# EAGLE board ww4 (EAGLE 7.2.0), part 1 of 2
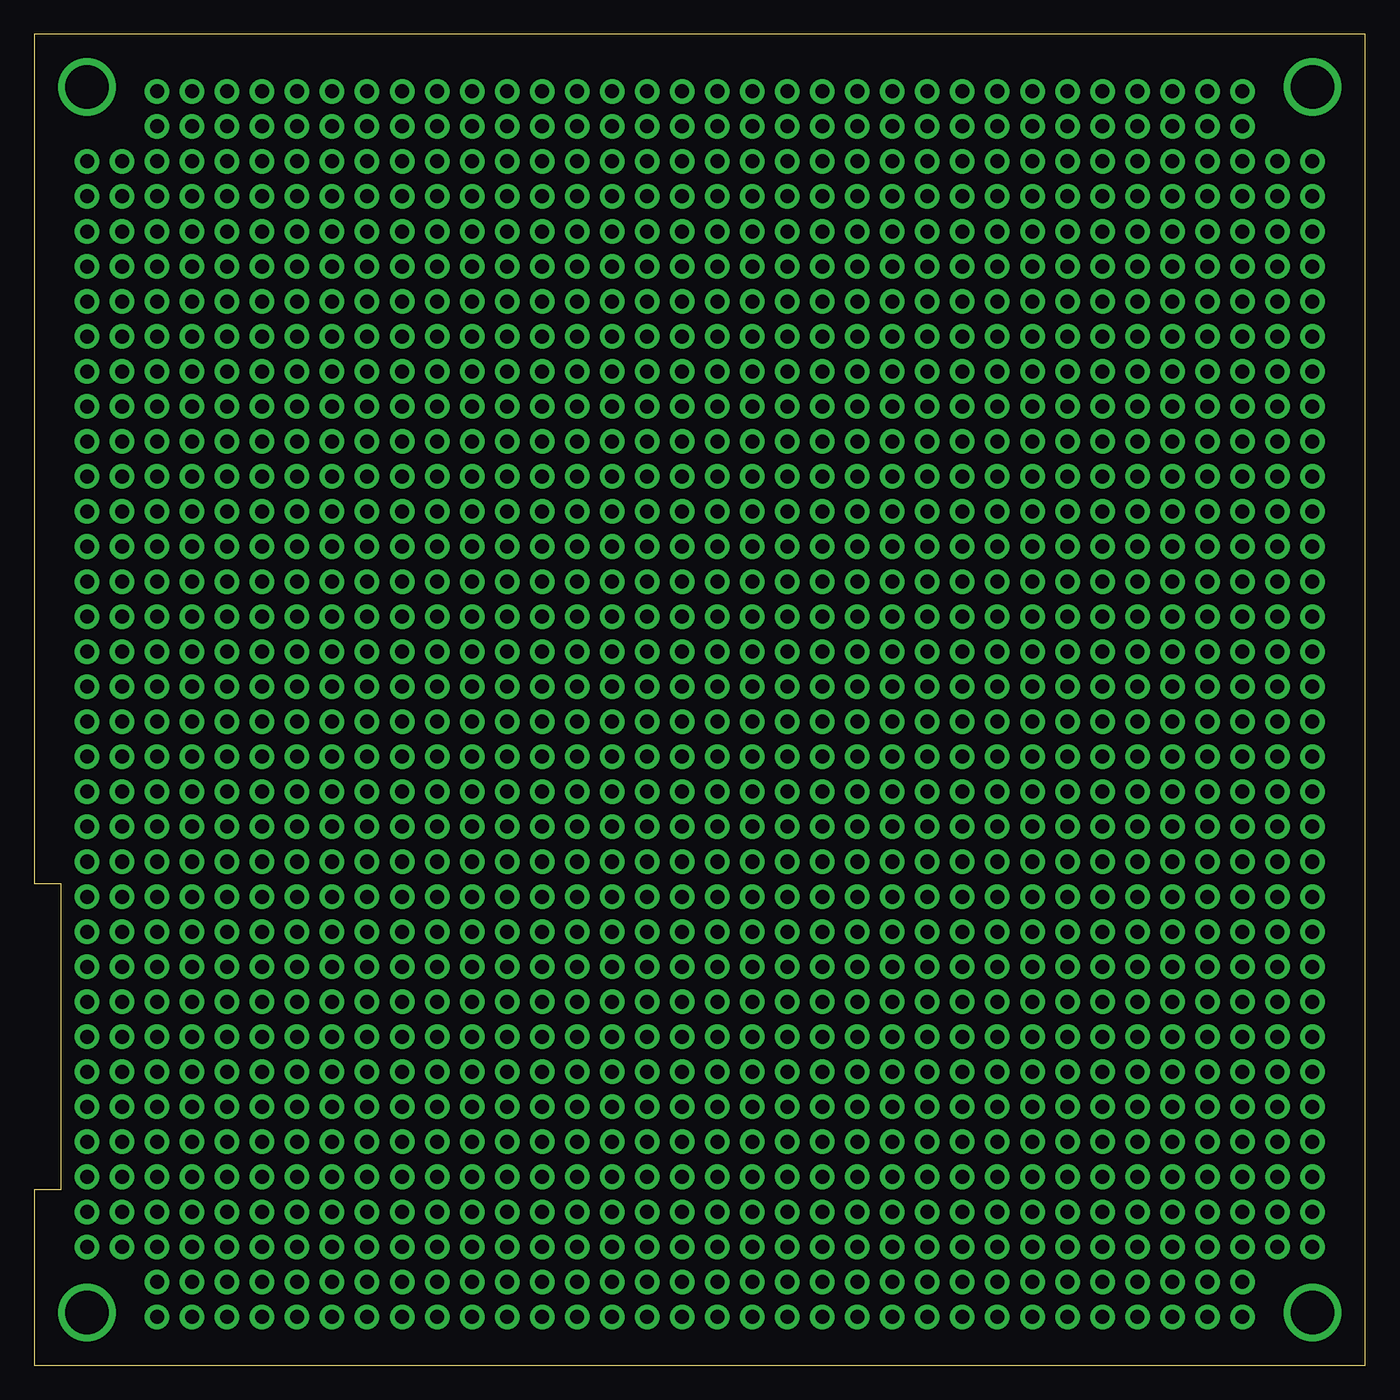
[diagram p0: board, top side]

Size 96.52 x 96.52 mm. Coordinates in mm from the lower left corner, seen from the top.
Outline: 0,0 96.52,0 96.52,96.52 0,96.52 0,34.92 1.91,34.92 1.91,12.7 0,12.7 0,0
Copper layers (1*16): Top 0.035mm / dielectric 1.5mm / Bottom 0.035mm
Design rules "default": minimum track width 10mil, minimum drill 24mil, track to track 8mil, track to pad 8mil, pad to pad 8mil, via to via 8mil, smd to smd 8mil, copper to edge 20mil, drill to drill 8mil, minimum pad ring 10mil, minimum via ring 8mil, stop-mask expansion 4mil, vias tented up to drill 0mil, thermal gap 10mil

## Placement (x,y rotation side)

## Tracks (layer width: path | path; a pad name or v marks a point on that pad's centre or on a via)
MOUNT0  (via drill 3.17 pad 3.17)
  other vias: 3.81,3.81
MOUNT1  (via drill 3.17 pad 3.17)
  other vias: 3.81,92.71
MOUNT2  (via drill 3.17 pad 3.17)
  other vias: 92.71,92.71
MOUNT3  (via drill 3.17 pad 3.17)
  other vias: 3.81,92.71
MOUNT6  (via drill 3.17 pad 3.17)
  other vias: 92.71,3.81
MOUNT7  (via drill 3.17 pad 3.17)
  other vias: 92.71,92.71
WW2  (via drill 1.02 pad 1.78)
  other vias: 3.81,8.57
WW3  (via drill 1.02 pad 1.78)
  other vias: 3.81,11.11
WW4  (via drill 1.02 pad 1.78)
  other vias: 3.81,13.65
WW5  (via drill 1.02 pad 1.78)
  other vias: 3.81,16.19
WW6  (via drill 1.02 pad 1.78)
  other vias: 3.81,18.73
WW7  (via drill 1.02 pad 1.78)
  other vias: 3.81,21.27
WW8  (via drill 1.02 pad 1.78)
  other vias: 3.81,23.81
WW9  (via drill 1.02 pad 1.78)
  other vias: 3.81,26.35
WW10  (via drill 1.02 pad 1.78)
  other vias: 3.81,28.89
WW11  (via drill 1.02 pad 1.78)
  other vias: 3.81,31.43
WW12  (via drill 1.02 pad 1.78)
  other vias: 3.81,33.97
WW13  (via drill 1.02 pad 1.78)
  other vias: 3.81,36.51
WW14  (via drill 1.02 pad 1.78)
  other vias: 3.81,39.05
WW15  (via drill 1.02 pad 1.78)
  other vias: 3.81,41.59
WW16  (via drill 1.02 pad 1.78)
  other vias: 3.81,44.13
WW17  (via drill 1.02 pad 1.78)
  other vias: 3.81,46.67
WW18  (via drill 1.02 pad 1.78)
  other vias: 3.81,49.21
WW19  (via drill 1.02 pad 1.78)
  other vias: 3.81,51.75
WW20  (via drill 1.02 pad 1.78)
  other vias: 3.81,54.29
WW21  (via drill 1.02 pad 1.78)
  other vias: 3.81,56.83
WW22  (via drill 1.02 pad 1.78)
  other vias: 3.81,59.37
WW23  (via drill 1.02 pad 1.78)
  other vias: 3.81,61.91
WW24  (via drill 1.02 pad 1.78)
  other vias: 3.81,64.45
WW25  (via drill 1.02 pad 1.78)
  other vias: 3.81,66.99
WW26  (via drill 1.02 pad 1.78)
  other vias: 3.81,69.53
WW27  (via drill 1.02 pad 1.78)
  other vias: 3.81,72.07
WW28  (via drill 1.02 pad 1.78)
  other vias: 3.81,74.61
WW29  (via drill 1.02 pad 1.78)
  other vias: 3.81,77.15
WW30  (via drill 1.02 pad 1.78)
  other vias: 3.81,79.69
WW31  (via drill 1.02 pad 1.78)
  other vias: 3.81,82.23
WW32  (via drill 1.02 pad 1.78)
  other vias: 3.81,84.77
WW33  (via drill 1.02 pad 1.78)
  other vias: 3.81,87.31
WW39  (via drill 1.02 pad 1.78)
  other vias: 6.35,8.57
WW40  (via drill 1.02 pad 1.78)
  other vias: 6.35,11.11
WW41  (via drill 1.02 pad 1.78)
  other vias: 6.35,13.65
WW42  (via drill 1.02 pad 1.78)
  other vias: 6.35,16.19
WW43  (via drill 1.02 pad 1.78)
  other vias: 6.35,18.73
WW44  (via drill 1.02 pad 1.78)
  other vias: 6.35,21.27
WW45  (via drill 1.02 pad 1.78)
  other vias: 6.35,23.81
WW46  (via drill 1.02 pad 1.78)
  other vias: 6.35,26.35
WW47  (via drill 1.02 pad 1.78)
  other vias: 6.35,28.89
WW48  (via drill 1.02 pad 1.78)
  other vias: 6.35,31.43
WW49  (via drill 1.02 pad 1.78)
  other vias: 6.35,33.97
WW50  (via drill 1.02 pad 1.78)
  other vias: 6.35,36.51
WW51  (via drill 1.02 pad 1.78)
  other vias: 6.35,39.05
WW52  (via drill 1.02 pad 1.78)
  other vias: 6.35,41.59
WW53  (via drill 1.02 pad 1.78)
  other vias: 6.35,44.13
WW54  (via drill 1.02 pad 1.78)
  other vias: 6.35,46.67
WW55  (via drill 1.02 pad 1.78)
  other vias: 6.35,49.21
WW56  (via drill 1.02 pad 1.78)
  other vias: 6.35,51.75
WW57  (via drill 1.02 pad 1.78)
  other vias: 6.35,54.29
WW58  (via drill 1.02 pad 1.78)
  other vias: 6.35,56.83
WW59  (via drill 1.02 pad 1.78)
  other vias: 6.35,59.37
WW60  (via drill 1.02 pad 1.78)
  other vias: 6.35,61.91
WW61  (via drill 1.02 pad 1.78)
  other vias: 6.35,64.45
WW62  (via drill 1.02 pad 1.78)
  other vias: 6.35,66.99
WW63  (via drill 1.02 pad 1.78)
  other vias: 6.35,69.53
WW64  (via drill 1.02 pad 1.78)
  other vias: 6.35,72.07
WW65  (via drill 1.02 pad 1.78)
  other vias: 6.35,74.61
WW66  (via drill 1.02 pad 1.78)
  other vias: 6.35,77.15
WW67  (via drill 1.02 pad 1.78)
  other vias: 6.35,79.69
WW68  (via drill 1.02 pad 1.78)
  other vias: 6.35,82.23
WW69  (via drill 1.02 pad 1.78)
  other vias: 6.35,84.77
WW70  (via drill 1.02 pad 1.78)
  other vias: 6.35,87.31
WW74  (via drill 1.02 pad 1.78)
  other vias: 8.89,3.49
WW75  (via drill 1.02 pad 1.78)
  other vias: 8.89,6.03
WW76  (via drill 1.02 pad 1.78)
  other vias: 8.89,8.57
WW77  (via drill 1.02 pad 1.78)
  other vias: 8.89,11.11
WW78  (via drill 1.02 pad 1.78)
  other vias: 8.89,13.65
WW79  (via drill 1.02 pad 1.78)
  other vias: 8.89,16.19
WW80  (via drill 1.02 pad 1.78)
  other vias: 8.89,18.73
WW81  (via drill 1.02 pad 1.78)
  other vias: 8.89,21.27
WW82  (via drill 1.02 pad 1.78)
  other vias: 8.89,23.81
WW83  (via drill 1.02 pad 1.78)
  other vias: 8.89,26.35
WW84  (via drill 1.02 pad 1.78)
  other vias: 8.89,28.89
WW85  (via drill 1.02 pad 1.78)
  other vias: 8.89,31.43
WW86  (via drill 1.02 pad 1.78)
  other vias: 8.89,33.97
WW87  (via drill 1.02 pad 1.78)
  other vias: 8.89,36.51
WW88  (via drill 1.02 pad 1.78)
  other vias: 8.89,39.05
WW89  (via drill 1.02 pad 1.78)
  other vias: 8.89,41.59
WW90  (via drill 1.02 pad 1.78)
  other vias: 8.89,44.13
WW91  (via drill 1.02 pad 1.78)
  other vias: 8.89,46.67
WW92  (via drill 1.02 pad 1.78)
  other vias: 8.89,49.21
WW93  (via drill 1.02 pad 1.78)
  other vias: 8.89,51.75
WW94  (via drill 1.02 pad 1.78)
  other vias: 8.89,54.29
WW95  (via drill 1.02 pad 1.78)
  other vias: 8.89,56.83
WW96  (via drill 1.02 pad 1.78)
  other vias: 8.89,59.37
WW97  (via drill 1.02 pad 1.78)
  other vias: 8.89,61.91
WW98  (via drill 1.02 pad 1.78)
  other vias: 8.89,64.45
WW99  (via drill 1.02 pad 1.78)
  other vias: 8.89,66.99
WW100  (via drill 1.02 pad 1.78)
  other vias: 8.89,69.53
WW101  (via drill 1.02 pad 1.78)
  other vias: 8.89,72.07
WW102  (via drill 1.02 pad 1.78)
  other vias: 8.89,74.61
WW103  (via drill 1.02 pad 1.78)
  other vias: 8.89,77.15
WW104  (via drill 1.02 pad 1.78)
  other vias: 8.89,79.69
WW105  (via drill 1.02 pad 1.78)
  other vias: 8.89,82.23
WW106  (via drill 1.02 pad 1.78)
  other vias: 8.89,84.77
WW107  (via drill 1.02 pad 1.78)
  other vias: 8.89,87.31
WW108  (via drill 1.02 pad 1.78)
  other vias: 8.89,89.85
WW109  (via drill 1.02 pad 1.78)
  other vias: 8.89,92.39
WW111  (via drill 1.02 pad 1.78)
  other vias: 11.43,3.49
WW112  (via drill 1.02 pad 1.78)
  other vias: 11.43,6.03
WW113  (via drill 1.02 pad 1.78)
  other vias: 11.43,8.57
WW114  (via drill 1.02 pad 1.78)
  other vias: 11.43,11.11
WW115  (via drill 1.02 pad 1.78)
  other vias: 11.43,13.65
WW116  (via drill 1.02 pad 1.78)
  other vias: 11.43,16.19
WW117  (via drill 1.02 pad 1.78)
  other vias: 11.43,18.73
WW118  (via drill 1.02 pad 1.78)
  other vias: 11.43,21.27
WW119  (via drill 1.02 pad 1.78)
  other vias: 11.43,23.81
WW120  (via drill 1.02 pad 1.78)
  other vias: 11.43,26.35
WW121  (via drill 1.02 pad 1.78)
  other vias: 11.43,28.89
WW122  (via drill 1.02 pad 1.78)
  other vias: 11.43,31.43
WW123  (via drill 1.02 pad 1.78)
  other vias: 11.43,33.97
WW124  (via drill 1.02 pad 1.78)
  other vias: 11.43,36.51
WW125  (via drill 1.02 pad 1.78)
  other vias: 11.43,39.05
WW126  (via drill 1.02 pad 1.78)
  other vias: 11.43,41.59
WW127  (via drill 1.02 pad 1.78)
  other vias: 11.43,44.13
WW128  (via drill 1.02 pad 1.78)
  other vias: 11.43,46.67
WW129  (via drill 1.02 pad 1.78)
  other vias: 11.43,49.21
WW130  (via drill 1.02 pad 1.78)
  other vias: 11.43,51.75
WW131  (via drill 1.02 pad 1.78)
  other vias: 11.43,54.29
WW132  (via drill 1.02 pad 1.78)
  other vias: 11.43,56.83
WW133  (via drill 1.02 pad 1.78)
  other vias: 11.43,59.37
WW134  (via drill 1.02 pad 1.78)
  other vias: 11.43,61.91
WW135  (via drill 1.02 pad 1.78)
  other vias: 11.43,64.45
WW136  (via drill 1.02 pad 1.78)
  other vias: 11.43,66.99
WW137  (via drill 1.02 pad 1.78)
  other vias: 11.43,69.53
WW138  (via drill 1.02 pad 1.78)
  other vias: 11.43,72.07
WW139  (via drill 1.02 pad 1.78)
  other vias: 11.43,74.61
WW140  (via drill 1.02 pad 1.78)
  other vias: 11.43,77.15
WW141  (via drill 1.02 pad 1.78)
  other vias: 11.43,79.69
WW142  (via drill 1.02 pad 1.78)
  other vias: 11.43,82.23
WW143  (via drill 1.02 pad 1.78)
  other vias: 11.43,84.77
WW144  (via drill 1.02 pad 1.78)
  other vias: 11.43,87.31
WW145  (via drill 1.02 pad 1.78)
  other vias: 11.43,89.85
WW146  (via drill 1.02 pad 1.78)
  other vias: 11.43,92.39
WW148  (via drill 1.02 pad 1.78)
  other vias: 13.97,3.49
WW149  (via drill 1.02 pad 1.78)
  other vias: 13.97,6.03
WW150  (via drill 1.02 pad 1.78)
  other vias: 13.97,8.57
WW151  (via drill 1.02 pad 1.78)
  other vias: 13.97,11.11
WW152  (via drill 1.02 pad 1.78)
  other vias: 13.97,13.65
WW153  (via drill 1.02 pad 1.78)
  other vias: 13.97,16.19
WW154  (via drill 1.02 pad 1.78)
  other vias: 13.97,18.73
WW155  (via drill 1.02 pad 1.78)
  other vias: 13.97,21.27
WW156  (via drill 1.02 pad 1.78)
  other vias: 13.97,23.81
WW157  (via drill 1.02 pad 1.78)
  other vias: 13.97,26.35
WW158  (via drill 1.02 pad 1.78)
  other vias: 13.97,28.89
WW159  (via drill 1.02 pad 1.78)
  other vias: 13.97,31.43
WW160  (via drill 1.02 pad 1.78)
  other vias: 13.97,33.97
WW161  (via drill 1.02 pad 1.78)
  other vias: 13.97,36.51
WW162  (via drill 1.02 pad 1.78)
  other vias: 13.97,39.05
WW163  (via drill 1.02 pad 1.78)
  other vias: 13.97,41.59
WW164  (via drill 1.02 pad 1.78)
  other vias: 13.97,44.13
WW165  (via drill 1.02 pad 1.78)
  other vias: 13.97,46.67
WW166  (via drill 1.02 pad 1.78)
  other vias: 13.97,49.21
WW167  (via drill 1.02 pad 1.78)
  other vias: 13.97,51.75
WW168  (via drill 1.02 pad 1.78)
  other vias: 13.97,54.29
WW169  (via drill 1.02 pad 1.78)
  other vias: 13.97,56.83
WW170  (via drill 1.02 pad 1.78)
  other vias: 13.97,59.37
WW171  (via drill 1.02 pad 1.78)
  other vias: 13.97,61.91
WW172  (via drill 1.02 pad 1.78)
  other vias: 13.97,64.45
WW173  (via drill 1.02 pad 1.78)
  other vias: 13.97,66.99
WW174  (via drill 1.02 pad 1.78)
  other vias: 13.97,69.53
WW175  (via drill 1.02 pad 1.78)
  other vias: 13.97,72.07
WW176  (via drill 1.02 pad 1.78)
  other vias: 13.97,74.61
WW177  (via drill 1.02 pad 1.78)
  other vias: 13.97,77.15
WW178  (via drill 1.02 pad 1.78)
  other vias: 13.97,79.69
WW179  (via drill 1.02 pad 1.78)
  other vias: 13.97,82.23
WW180  (via drill 1.02 pad 1.78)
  other vias: 13.97,84.77
WW181  (via drill 1.02 pad 1.78)
  other vias: 13.97,87.31
WW182  (via drill 1.02 pad 1.78)
  other vias: 13.97,89.85
WW183  (via drill 1.02 pad 1.78)
  other vias: 13.97,92.39
WW185  (via drill 1.02 pad 1.78)
  other vias: 16.51,3.49
WW186  (via drill 1.02 pad 1.78)
  other vias: 16.51,6.03
WW187  (via drill 1.02 pad 1.78)
  other vias: 16.51,8.57
WW188  (via drill 1.02 pad 1.78)
  other vias: 16.51,11.11
WW189  (via drill 1.02 pad 1.78)
  other vias: 16.51,13.65
WW190  (via drill 1.02 pad 1.78)
  other vias: 16.51,16.19
WW191  (via drill 1.02 pad 1.78)
  other vias: 16.51,18.73
WW192  (via drill 1.02 pad 1.78)
  other vias: 16.51,21.27
WW193  (via drill 1.02 pad 1.78)
  other vias: 16.51,23.81
WW194  (via drill 1.02 pad 1.78)
  other vias: 16.51,26.35
WW195  (via drill 1.02 pad 1.78)
  other vias: 16.51,28.89
WW196  (via drill 1.02 pad 1.78)
  other vias: 16.51,31.43
WW197  (via drill 1.02 pad 1.78)
  other vias: 16.51,33.97
WW198  (via drill 1.02 pad 1.78)
  other vias: 16.51,36.51
WW199  (via drill 1.02 pad 1.78)
  other vias: 16.51,39.05
WW200  (via drill 1.02 pad 1.78)
  other vias: 16.51,41.59
WW201  (via drill 1.02 pad 1.78)
  other vias: 16.51,44.13
WW202  (via drill 1.02 pad 1.78)
  other vias: 16.51,46.67
WW203  (via drill 1.02 pad 1.78)
  other vias: 16.51,49.21
WW204  (via drill 1.02 pad 1.78)
  other vias: 16.51,51.75
WW205  (via drill 1.02 pad 1.78)
  other vias: 16.51,54.29
WW206  (via drill 1.02 pad 1.78)
  other vias: 16.51,56.83
WW207  (via drill 1.02 pad 1.78)
  other vias: 16.51,59.37
WW208  (via drill 1.02 pad 1.78)
  other vias: 16.51,61.91
WW209  (via drill 1.02 pad 1.78)
  other vias: 16.51,64.45
WW210  (via drill 1.02 pad 1.78)
  other vias: 16.51,66.99
WW211  (via drill 1.02 pad 1.78)
  other vias: 16.51,69.53
WW212  (via drill 1.02 pad 1.78)
  other vias: 16.51,72.07
WW213  (via drill 1.02 pad 1.78)
  other vias: 16.51,74.61
WW214  (via drill 1.02 pad 1.78)
  other vias: 16.51,77.15
WW215  (via drill 1.02 pad 1.78)
  other vias: 16.51,79.69
WW216  (via drill 1.02 pad 1.78)
  other vias: 16.51,82.23
WW217  (via drill 1.02 pad 1.78)
  other vias: 16.51,84.77
WW218  (via drill 1.02 pad 1.78)
  other vias: 16.51,87.31
WW219  (via drill 1.02 pad 1.78)
  other vias: 16.51,89.85
WW220  (via drill 1.02 pad 1.78)
  other vias: 16.51,92.39
WW222  (via drill 1.02 pad 1.78)
  other vias: 19.05,3.49
WW223  (via drill 1.02 pad 1.78)
  other vias: 19.05,6.03
WW224  (via drill 1.02 pad 1.78)
  other vias: 19.05,8.57
WW225  (via drill 1.02 pad 1.78)
  other vias: 19.05,11.11
WW226  (via drill 1.02 pad 1.78)
  other vias: 19.05,13.65
WW227  (via drill 1.02 pad 1.78)
  other vias: 19.05,16.19
WW228  (via drill 1.02 pad 1.78)
  other vias: 19.05,18.73
WW229  (via drill 1.02 pad 1.78)
  other vias: 19.05,21.27
WW230  (via drill 1.02 pad 1.78)
  other vias: 19.05,23.81
WW231  (via drill 1.02 pad 1.78)
  other vias: 19.05,26.35
WW232  (via drill 1.02 pad 1.78)
  other vias: 19.05,28.89
WW233  (via drill 1.02 pad 1.78)
  other vias: 19.05,31.43
WW234  (via drill 1.02 pad 1.78)
  other vias: 19.05,33.97
WW235  (via drill 1.02 pad 1.78)
  other vias: 19.05,36.51
WW236  (via drill 1.02 pad 1.78)
  other vias: 19.05,39.05
WW237  (via drill 1.02 pad 1.78)
  other vias: 19.05,41.59
WW238  (via drill 1.02 pad 1.78)
  other vias: 19.05,44.13
WW239  (via drill 1.02 pad 1.78)
  other vias: 19.05,46.67
WW240  (via drill 1.02 pad 1.78)
  other vias: 19.05,49.21
WW241  (via drill 1.02 pad 1.78)
  other vias: 19.05,51.75
WW242  (via drill 1.02 pad 1.78)
  other vias: 19.05,54.29
WW243  (via drill 1.02 pad 1.78)
  other vias: 19.05,56.83
WW244  (via drill 1.02 pad 1.78)
  other vias: 19.05,59.37
WW245  (via drill 1.02 pad 1.78)
  other vias: 19.05,61.91
WW246  (via drill 1.02 pad 1.78)
  other vias: 19.05,64.45
WW247  (via drill 1.02 pad 1.78)
  other vias: 19.05,66.99
WW248  (via drill 1.02 pad 1.78)
  other vias: 19.05,69.53
WW249  (via drill 1.02 pad 1.78)
  other vias: 19.05,72.07
WW250  (via drill 1.02 pad 1.78)
  other vias: 19.05,74.61
WW251  (via drill 1.02 pad 1.78)
  other vias: 19.05,77.15
WW252  (via drill 1.02 pad 1.78)
  other vias: 19.05,79.69
WW253  (via drill 1.02 pad 1.78)
  other vias: 19.05,82.23
WW254  (via drill 1.02 pad 1.78)
  other vias: 19.05,84.77
WW255  (via drill 1.02 pad 1.78)
  other vias: 19.05,87.31
WW256  (via drill 1.02 pad 1.78)
  other vias: 19.05,89.85
WW257  (via drill 1.02 pad 1.78)
  other vias: 19.05,92.39
WW259  (via drill 1.02 pad 1.78)
  other vias: 21.59,3.49
WW260  (via drill 1.02 pad 1.78)
  other vias: 21.59,6.03
WW261  (via drill 1.02 pad 1.78)
  other vias: 21.59,8.57
WW262  (via drill 1.02 pad 1.78)
  other vias: 21.59,11.11
WW263  (via drill 1.02 pad 1.78)
  other vias: 21.59,13.65
WW264  (via drill 1.02 pad 1.78)
  other vias: 21.59,16.19
WW265  (via drill 1.02 pad 1.78)
  other vias: 21.59,18.73
WW266  (via drill 1.02 pad 1.78)
  other vias: 21.59,21.27
WW267  (via drill 1.02 pad 1.78)
  other vias: 21.59,23.81
WW268  (via drill 1.02 pad 1.78)
  other vias: 21.59,26.35
WW269  (via drill 1.02 pad 1.78)
  other vias: 21.59,28.89
WW270  (via drill 1.02 pad 1.78)
  other vias: 21.59,31.43
WW271  (via drill 1.02 pad 1.78)
  other vias: 21.59,33.97
WW272  (via drill 1.02 pad 1.78)
  other vias: 21.59,36.51
WW273  (via drill 1.02 pad 1.78)
  other vias: 21.59,39.05
WW274  (via drill 1.02 pad 1.78)
  other vias: 21.59,41.59
WW275  (via drill 1.02 pad 1.78)
  other vias: 21.59,44.13
WW276  (via drill 1.02 pad 1.78)
  other vias: 21.59,46.67
WW277  (via drill 1.02 pad 1.78)
  other vias: 21.59,49.21
WW278  (via drill 1.02 pad 1.78)
  other vias: 21.59,51.75
WW279  (via drill 1.02 pad 1.78)
  other vias: 21.59,54.29
WW280  (via drill 1.02 pad 1.78)
  other vias: 21.59,56.83
WW281  (via drill 1.02 pad 1.78)
  other vias: 21.59,59.37
WW282  (via drill 1.02 pad 1.78)
  other vias: 21.59,61.91
WW283  (via drill 1.02 pad 1.78)
  other vias: 21.59,64.45
WW284  (via drill 1.02 pad 1.78)
  other vias: 21.59,66.99
WW285  (via drill 1.02 pad 1.78)
  other vias: 21.59,69.53
WW286  (via drill 1.02 pad 1.78)
  other vias: 21.59,72.07
WW287  (via drill 1.02 pad 1.78)
  other vias: 21.59,74.61
WW288  (via drill 1.02 pad 1.78)
  other vias: 21.59,77.15
WW289  (via drill 1.02 pad 1.78)
  other vias: 21.59,79.69
WW290  (via drill 1.02 pad 1.78)
  other vias: 21.59,82.23
WW291  (via drill 1.02 pad 1.78)
  other vias: 21.59,84.77
WW292  (via drill 1.02 pad 1.78)
  other vias: 21.59,87.31
WW293  (via drill 1.02 pad 1.78)
  other vias: 21.59,89.85
WW294  (via drill 1.02 pad 1.78)
  other vias: 21.59,92.39
WW296  (via drill 1.02 pad 1.78)
  other vias: 24.13,3.49
WW297  (via drill 1.02 pad 1.78)
  other vias: 24.13,6.03
WW298  (via drill 1.02 pad 1.78)
  other vias: 24.13,8.57
WW299  (via drill 1.02 pad 1.78)
  other vias: 24.13,11.11
WW300  (via drill 1.02 pad 1.78)
  other vias: 24.13,13.65
WW301  (via drill 1.02 pad 1.78)
  other vias: 24.13,16.19
WW302  (via drill 1.02 pad 1.78)
  other vias: 24.13,18.73
WW303  (via drill 1.02 pad 1.78)
  other vias: 24.13,21.27
WW304  (via drill 1.02 pad 1.78)
  other vias: 24.13,23.81
WW305  (via drill 1.02 pad 1.78)
  other vias: 24.13,26.35
WW306  (via drill 1.02 pad 1.78)
  other vias: 24.13,28.89
WW307  (via drill 1.02 pad 1.78)
  other vias: 24.13,31.43
WW308  (via drill 1.02 pad 1.78)
  other vias: 24.13,33.97
WW309  (via drill 1.02 pad 1.78)
  other vias: 24.13,36.51
WW310  (via drill 1.02 pad 1.78)
  other vias: 24.13,39.05
WW311  (via drill 1.02 pad 1.78)
  other vias: 24.13,41.59
WW312  (via drill 1.02 pad 1.78)
  other vias: 24.13,44.13
WW313  (via drill 1.02 pad 1.78)
  other vias: 24.13,46.67
WW314  (via drill 1.02 pad 1.78)
  other vias: 24.13,49.21
WW315  (via drill 1.02 pad 1.78)
  other vias: 24.13,51.75
WW316  (via drill 1.02 pad 1.78)
  other vias: 24.13,54.29
WW317  (via drill 1.02 pad 1.78)
  other vias: 24.13,56.83
WW318  (via drill 1.02 pad 1.78)
  other vias: 24.13,59.37
WW319  (via drill 1.02 pad 1.78)
  other vias: 24.13,61.91
WW320  (via drill 1.02 pad 1.78)
  other vias: 24.13,64.45
WW321  (via drill 1.02 pad 1.78)
  other vias: 24.13,66.99
WW322  (via drill 1.02 pad 1.78)
  other vias: 24.13,69.53
WW323  (via drill 1.02 pad 1.78)
  other vias: 24.13,72.07
WW324  (via drill 1.02 pad 1.78)
  other vias: 24.13,74.61
WW325  (via drill 1.02 pad 1.78)
  other vias: 24.13,77.15
WW326  (via drill 1.02 pad 1.78)
  other vias: 24.13,79.69
WW327  (via drill 1.02 pad 1.78)
  other vias: 24.13,82.23
WW328  (via drill 1.02 pad 1.78)
  other vias: 24.13,84.77
WW329  (via drill 1.02 pad 1.78)
  other vias: 24.13,87.31
WW330  (via drill 1.02 pad 1.78)
  other vias: 24.13,89.85
WW331  (via drill 1.02 pad 1.78)
  other vias: 24.13,92.39
WW333  (via drill 1.02 pad 1.78)
  other vias: 26.67,3.49
WW334  (via drill 1.02 pad 1.78)
  other vias: 26.67,6.03
WW335  (via drill 1.02 pad 1.78)
  other vias: 26.67,8.57
WW336  (via drill 1.02 pad 1.78)
  other vias: 26.67,11.11
WW337  (via drill 1.02 pad 1.78)
  other vias: 26.67,13.65
WW338  (via drill 1.02 pad 1.78)
  other vias: 26.67,16.19
WW339  (via drill 1.02 pad 1.78)
  other vias: 26.67,18.73
WW340  (via drill 1.02 pad 1.78)
  other vias: 26.67,21.27
WW341  (via drill 1.02 pad 1.78)
  other vias: 26.67,23.81
WW342  (via drill 1.02 pad 1.78)
  other vias: 26.67,26.35
WW343  (via drill 1.02 pad 1.78)
  other vias: 26.67,28.89
WW344  (via drill 1.02 pad 1.78)
  other vias: 26.67,31.43
WW345  (via drill 1.02 pad 1.78)
  other vias: 26.67,33.97
WW346  (via drill 1.02 pad 1.78)
  other vias: 26.67,36.51
WW347  (via drill 1.02 pad 1.78)
  other vias: 26.67,39.05
WW348  (via drill 1.02 pad 1.78)
  other vias: 26.67,41.59
WW349  (via drill 1.02 pad 1.78)
  other vias: 26.67,44.13
WW350  (via drill 1.02 pad 1.78)
  other vias: 26.67,46.67
WW351  (via drill 1.02 pad 1.78)
  other vias: 26.67,49.21
WW352  (via drill 1.02 pad 1.78)
  other vias: 26.67,51.75
WW353  (via drill 1.02 pad 1.78)
  other vias: 26.67,54.29
WW354  (via drill 1.02 pad 1.78)
  other vias: 26.67,56.83
WW355  (via drill 1.02 pad 1.78)
  other vias: 26.67,59.37
WW356  (via drill 1.02 pad 1.78)
  other vias: 26.67,61.91
WW357  (via drill 1.02 pad 1.78)
  other vias: 26.67,64.45
WW358  (via drill 1.02 pad 1.78)
  other vias: 26.67,66.99
WW359  (via drill 1.02 pad 1.78)
  other vias: 26.67,69.53
WW360  (via drill 1.02 pad 1.78)
  other vias: 26.67,72.07
WW361  (via drill 1.02 pad 1.78)
  other vias: 26.67,74.61
WW362  (via drill 1.02 pad 1.78)
  other vias: 26.67,77.15
WW363  (via drill 1.02 pad 1.78)
  other vias: 26.67,79.69
WW364  (via drill 1.02 pad 1.78)
  other vias: 26.67,82.23
WW365  (via drill 1.02 pad 1.78)
  other vias: 26.67,84.77
WW366  (via drill 1.02 pad 1.78)
  other vias: 26.67,87.31
WW367  (via drill 1.02 pad 1.78)
  other vias: 26.67,89.85
WW368  (via drill 1.02 pad 1.78)
  other vias: 26.67,92.39
WW370  (via drill 1.02 pad 1.78)
  other vias: 29.21,3.49
WW371  (via drill 1.02 pad 1.78)
  other vias: 29.21,6.03
WW372  (via drill 1.02 pad 1.78)
  other vias: 29.21,8.57
WW373  (via drill 1.02 pad 1.78)
  other vias: 29.21,11.11
WW374  (via drill 1.02 pad 1.78)
  other vias: 29.21,13.65
WW375  (via drill 1.02 pad 1.78)
  other vias: 29.21,16.19
WW376  (via drill 1.02 pad 1.78)
  other vias: 29.21,18.73
WW377  (via drill 1.02 pad 1.78)
  other vias: 29.21,21.27
WW378  (via drill 1.02 pad 1.78)
  other vias: 29.21,23.81
WW379  (via drill 1.02 pad 1.78)
  other vias: 29.21,26.35
WW380  (via drill 1.02 pad 1.78)
  other vias: 29.21,28.89
WW381  (via drill 1.02 pad 1.78)
  other vias: 29.21,31.43
WW382  (via drill 1.02 pad 1.78)
  other vias: 29.21,33.97
WW383  (via drill 1.02 pad 1.78)
  other vias: 29.21,36.51
WW384  (via drill 1.02 pad 1.78)
  other vias: 29.21,39.05
WW385  (via drill 1.02 pad 1.78)
  other vias: 29.21,41.59
WW386  (via drill 1.02 pad 1.78)
  other vias: 29.21,44.13
WW387  (via drill 1.02 pad 1.78)
  other vias: 29.21,46.67
WW388  (via drill 1.02 pad 1.78)
  other vias: 29.21,49.21
WW389  (via drill 1.02 pad 1.78)
  other vias: 29.21,51.75
WW390  (via drill 1.02 pad 1.78)
  other vias: 29.21,54.29
WW391  (via drill 1.02 pad 1.78)
  other vias: 29.21,56.83
WW392  (via drill 1.02 pad 1.78)
  other vias: 29.21,59.37
WW393  (via drill 1.02 pad 1.78)
  other vias: 29.21,61.91
WW394  (via drill 1.02 pad 1.78)
  other vias: 29.21,64.45
WW395  (via drill 1.02 pad 1.78)
  other vias: 29.21,66.99
WW396  (via drill 1.02 pad 1.78)
  other vias: 29.21,69.53
WW397  (via drill 1.02 pad 1.78)
  other vias: 29.21,72.07
WW398  (via drill 1.02 pad 1.78)
  other vias: 29.21,74.61
WW399  (via drill 1.02 pad 1.78)
  other vias: 29.21,77.15
WW400  (via drill 1.02 pad 1.78)
  other vias: 29.21,79.69
WW401  (via drill 1.02 pad 1.78)
  other vias: 29.21,82.23
WW402  (via drill 1.02 pad 1.78)
  other vias: 29.21,84.77
WW403  (via drill 1.02 pad 1.78)
  other vias: 29.21,87.31
WW404  (via drill 1.02 pad 1.78)
  other vias: 29.21,89.85
WW405  (via drill 1.02 pad 1.78)
  other vias: 29.21,92.39
WW407  (via drill 1.02 pad 1.78)
  other vias: 31.75,3.49
WW408  (via drill 1.02 pad 1.78)
  other vias: 31.75,6.03
WW409  (via drill 1.02 pad 1.78)
  other vias: 31.75,8.57
WW410  (via drill 1.02 pad 1.78)
  other vias: 31.75,11.11
WW411  (via drill 1.02 pad 1.78)
  other vias: 31.75,13.65
WW412  (via drill 1.02 pad 1.78)
  other vias: 31.75,16.19
WW413  (via drill 1.02 pad 1.78)
  other vias: 31.75,18.73
WW414  (via drill 1.02 pad 1.78)
  other vias: 31.75,21.27
WW415  (via drill 1.02 pad 1.78)
  other vias: 31.75,23.81
WW416  (via drill 1.02 pad 1.78)
  other vias: 31.75,26.35
WW417  (via drill 1.02 pad 1.78)
  other vias: 31.75,28.89
WW418  (via drill 1.02 pad 1.78)
  other vias: 31.75,31.43
WW419  (via drill 1.02 pad 1.78)
  other vias: 31.75,33.97
WW420  (via drill 1.02 pad 1.78)
  other vias: 31.75,36.51
WW421  (via drill 1.02 pad 1.78)
  other vias: 31.75,39.05
WW422  (via drill 1.02 pad 1.78)
  other vias: 31.75,41.59
WW423  (via drill 1.02 pad 1.78)
  other vias: 31.75,44.13
WW424  (via drill 1.02 pad 1.78)
  other vias: 31.75,46.67
WW425  (via drill 1.02 pad 1.78)
  other vias: 31.75,49.21
WW426  (via drill 1.02 pad 1.78)
  other vias: 31.75,51.75
WW427  (via drill 1.02 pad 1.78)
  other vias: 31.75,54.29
WW428  (via drill 1.02 pad 1.78)
  other vias: 31.75,56.83
WW429  (via drill 1.02 pad 1.78)
  other vias: 31.75,59.37
WW430  (via drill 1.02 pad 1.78)
  other vias: 31.75,61.91
WW431  (via drill 1.02 pad 1.78)
  other vias: 31.75,64.45
WW432  (via drill 1.02 pad 1.78)
  other vias: 31.75,66.99
WW433  (via drill 1.02 pad 1.78)
  other vias: 31.75,69.53
WW434  (via drill 1.02 pad 1.78)
  other vias: 31.75,72.07
WW435  (via drill 1.02 pad 1.78)
  other vias: 31.75,74.61
WW436  (via drill 1.02 pad 1.78)
  other vias: 31.75,77.15
WW437  (via drill 1.02 pad 1.78)
  other vias: 31.75,79.69
WW438  (via drill 1.02 pad 1.78)
  other vias: 31.75,82.23
WW439  (via drill 1.02 pad 1.78)
  other vias: 31.75,84.77
WW440  (via drill 1.02 pad 1.78)
  other vias: 31.75,87.31
WW441  (via drill 1.02 pad 1.78)
  other vias: 31.75,89.85
WW442  (via drill 1.02 pad 1.78)
  other vias: 31.75,92.39
WW444  (via drill 1.02 pad 1.78)
  other vias: 34.29,3.49
WW445  (via drill 1.02 pad 1.78)
  other vias: 34.29,6.03
WW446  (via drill 1.02 pad 1.78)
  other vias: 34.29,8.57
WW447  (via drill 1.02 pad 1.78)
  other vias: 34.29,11.11
WW448  (via drill 1.02 pad 1.78)
  other vias: 34.29,13.65
WW449  (via drill 1.02 pad 1.78)
  other vias: 34.29,16.19
WW450  (via drill 1.02 pad 1.78)
  other vias: 34.29,18.73
WW451  (via drill 1.02 pad 1.78)
  other vias: 34.29,21.27
WW452  (via drill 1.02 pad 1.78)
  other vias: 34.29,23.81
WW453  (via drill 1.02 pad 1.78)
  other vias: 34.29,26.35
WW454  (via drill 1.02 pad 1.78)
  other vias: 34.29,28.89
WW455  (via drill 1.02 pad 1.78)
  other vias: 34.29,31.43
WW456  (via drill 1.02 pad 1.78)
  other vias: 34.29,33.97
WW457  (via drill 1.02 pad 1.78)
  other vias: 34.29,36.51
WW458  (via drill 1.02 pad 1.78)
  other vias: 34.29,39.05
WW459  (via drill 1.02 pad 1.78)
  other vias: 34.29,41.59
WW460  (via drill 1.02 pad 1.78)
  other vias: 34.29,44.13
WW461  (via drill 1.02 pad 1.78)
  other vias: 34.29,46.67
WW462  (via drill 1.02 pad 1.78)
  other vias: 34.29,49.21
WW463  (via drill 1.02 pad 1.78)
  other vias: 34.29,51.75
WW464  (via drill 1.02 pad 1.78)
  other vias: 34.29,54.29
WW465  (via drill 1.02 pad 1.78)
  other vias: 34.29,56.83
WW466  (via drill 1.02 pad 1.78)
  other vias: 34.29,59.37
WW467  (via drill 1.02 pad 1.78)
  other vias: 34.29,61.91
WW468  (via drill 1.02 pad 1.78)
  other vias: 34.29,64.45
WW469  (via drill 1.02 pad 1.78)
  other vias: 34.29,66.99
WW470  (via drill 1.02 pad 1.78)
  other vias: 34.29,69.53
WW471  (via drill 1.02 pad 1.78)
  other vias: 34.29,72.07
WW472  (via drill 1.02 pad 1.78)
  other vias: 34.29,74.61
WW473  (via drill 1.02 pad 1.78)
  other vias: 34.29,77.15
WW474  (via drill 1.02 pad 1.78)
  other vias: 34.29,79.69
WW475  (via drill 1.02 pad 1.78)
  other vias: 34.29,82.23
WW476  (via drill 1.02 pad 1.78)
  other vias: 34.29,84.77
WW477  (via drill 1.02 pad 1.78)
  other vias: 34.29,87.31
WW478  (via drill 1.02 pad 1.78)
  other vias: 34.29,89.85
WW479  (via drill 1.02 pad 1.78)
  other vias: 34.29,92.39
WW481  (via drill 1.02 pad 1.78)
  other vias: 36.83,3.49
WW482  (via drill 1.02 pad 1.78)
  other vias: 36.83,6.03
WW483  (via drill 1.02 pad 1.78)
  other vias: 36.83,8.57
WW484  (via drill 1.02 pad 1.78)
  other vias: 36.83,11.11
WW485  (via drill 1.02 pad 1.78)
  other vias: 36.83,13.65
WW486  (via drill 1.02 pad 1.78)
  other vias: 36.83,16.19
WW487  (via drill 1.02 pad 1.78)
  other vias: 36.83,18.73
WW488  (via drill 1.02 pad 1.78)
  other vias: 36.83,21.27
WW489  (via drill 1.02 pad 1.78)
  other vias: 36.83,23.81
WW490  (via drill 1.02 pad 1.78)
  other vias: 36.83,26.35
WW491  (via drill 1.02 pad 1.78)
  other vias: 36.83,28.89
WW492  (via drill 1.02 pad 1.78)
  other vias: 36.83,31.43
WW493  (via drill 1.02 pad 1.78)
  other vias: 36.83,33.97
WW494  (via drill 1.02 pad 1.78)
  other vias: 36.83,36.51
WW495  (via drill 1.02 pad 1.78)
  other vias: 36.83,39.05
WW496  (via drill 1.02 pad 1.78)
  other vias: 36.83,41.59
WW497  (via drill 1.02 pad 1.78)
  other vias: 36.83,44.13
WW498  (via drill 1.02 pad 1.78)
  other vias: 36.83,46.67
WW499  (via drill 1.02 pad 1.78)
  other vias: 36.83,49.21
WW500  (via drill 1.02 pad 1.78)
  other vias: 36.83,51.75
WW501  (via drill 1.02 pad 1.78)
  other vias: 36.83,54.29
WW502  (via drill 1.02 pad 1.78)
  other vias: 36.83,56.83
WW503  (via drill 1.02 pad 1.78)
  other vias: 36.83,59.37
WW504  (via drill 1.02 pad 1.78)
  other vias: 36.83,61.91
WW505  (via drill 1.02 pad 1.78)
  other vias: 36.83,64.45
WW506  (via drill 1.02 pad 1.78)
  other vias: 36.83,66.99
WW507  (via drill 1.02 pad 1.78)
  other vias: 36.83,69.53
WW508  (via drill 1.02 pad 1.78)
  other vias: 36.83,72.07
WW509  (via drill 1.02 pad 1.78)
  other vias: 36.83,74.61
WW510  (via drill 1.02 pad 1.78)
  other vias: 36.83,77.15
WW511  (via drill 1.02 pad 1.78)
  other vias: 36.83,79.69
WW512  (via drill 1.02 pad 1.78)
  other vias: 36.83,82.23
WW513  (via drill 1.02 pad 1.78)
  other vias: 36.83,84.77
WW514  (via drill 1.02 pad 1.78)
  other vias: 36.83,87.31
WW515  (via drill 1.02 pad 1.78)
  other vias: 36.83,89.85
WW516  (via drill 1.02 pad 1.78)
  other vias: 36.83,92.39
WW518  (via drill 1.02 pad 1.78)
  other vias: 39.37,3.49
WW519  (via drill 1.02 pad 1.78)
  other vias: 39.37,6.03
WW520  (via drill 1.02 pad 1.78)
  other vias: 39.37,8.57
WW521  (via drill 1.02 pad 1.78)
  other vias: 39.37,11.11
WW522  (via drill 1.02 pad 1.78)
  other vias: 39.37,13.65
WW523  (via drill 1.02 pad 1.78)
  other vias: 39.37,16.19
WW524  (via drill 1.02 pad 1.78)
  other vias: 39.37,18.73
WW525  (via drill 1.02 pad 1.78)
  other vias: 39.37,21.27
WW526  (via drill 1.02 pad 1.78)
  other vias: 39.37,23.81
WW527  (via drill 1.02 pad 1.78)
  other vias: 39.37,26.35
WW528  (via drill 1.02 pad 1.78)
  other vias: 39.37,28.89
WW529  (via drill 1.02 pad 1.78)
  other vias: 39.37,31.43
WW530  (via drill 1.02 pad 1.78)
  other vias: 39.37,33.97
WW531  (via drill 1.02 pad 1.78)
  other vias: 39.37,36.51
WW532  (via drill 1.02 pad 1.78)
  other vias: 39.37,39.05
WW533  (via drill 1.02 pad 1.78)
  other vias: 39.37,41.59
WW534  (via drill 1.02 pad 1.78)
  other vias: 39.37,44.13
WW535  (via drill 1.02 pad 1.78)
  other vias: 39.37,46.67
WW536  (via drill 1.02 pad 1.78)
  other vias: 39.37,49.21
WW537  (via drill 1.02 pad 1.78)
  other vias: 39.37,51.75
WW538  (via drill 1.02 pad 1.78)
  other vias: 39.37,54.29
WW539  (via drill 1.02 pad 1.78)
  other vias: 39.37,56.83
WW540  (via drill 1.02 pad 1.78)
  other vias: 39.37,59.37
WW541  (via drill 1.02 pad 1.78)
  other vias: 39.37,61.91
WW542  (via drill 1.02 pad 1.78)
  other vias: 39.37,64.45
WW543  (via drill 1.02 pad 1.78)
  other vias: 39.37,66.99
WW544  (via drill 1.02 pad 1.78)
  other vias: 39.37,69.53
WW545  (via drill 1.02 pad 1.78)
  other vias: 39.37,72.07
WW546  (via drill 1.02 pad 1.78)
  other vias: 39.37,74.61
WW547  (via drill 1.02 pad 1.78)
  other vias: 39.37,77.15
WW548  (via drill 1.02 pad 1.78)
  other vias: 39.37,79.69
WW549  (via drill 1.02 pad 1.78)
  other vias: 39.37,82.23
WW550  (via drill 1.02 pad 1.78)
  other vias: 39.37,84.77
WW551  (via drill 1.02 pad 1.78)
  other vias: 39.37,87.31
WW552  (via drill 1.02 pad 1.78)
  other vias: 39.37,89.85
WW553  (via drill 1.02 pad 1.78)
  other vias: 39.37,92.39
WW555  (via drill 1.02 pad 1.78)
  other vias: 41.91,3.49
WW556  (via drill 1.02 pad 1.78)
  other vias: 41.91,6.03
WW557  (via drill 1.02 pad 1.78)
  other vias: 41.91,8.57
WW558  (via drill 1.02 pad 1.78)
  other vias: 41.91,11.11
WW559  (via drill 1.02 pad 1.78)
  other vias: 41.91,13.65
WW560  (via drill 1.02 pad 1.78)
  other vias: 41.91,16.19
WW561  (via drill 1.02 pad 1.78)
  other vias: 41.91,18.73
WW562  (via drill 1.02 pad 1.78)
  other vias: 41.91,21.27
WW563  (via drill 1.02 pad 1.78)
  other vias: 41.91,23.81
WW564  (via drill 1.02 pad 1.78)
  other vias: 41.91,26.35
WW565  (via drill 1.02 pad 1.78)
  other vias: 41.91,28.89
WW566  (via drill 1.02 pad 1.78)
  other vias: 41.91,31.43
WW567  (via drill 1.02 pad 1.78)
  other vias: 41.91,33.97
WW568  (via drill 1.02 pad 1.78)
  other vias: 41.91,36.51
WW569  (via drill 1.02 pad 1.78)
  other vias: 41.91,39.05
WW570  (via drill 1.02 pad 1.78)
  other vias: 41.91,41.59
WW571  (via drill 1.02 pad 1.78)
  other vias: 41.91,44.13
WW572  (via drill 1.02 pad 1.78)
  other vias: 41.91,46.67
WW573  (via drill 1.02 pad 1.78)
  other vias: 41.91,49.21
WW574  (via drill 1.02 pad 1.78)
  other vias: 41.91,51.75
WW575  (via drill 1.02 pad 1.78)
  other vias: 41.91,54.29
WW576  (via drill 1.02 pad 1.78)
  other vias: 41.91,56.83
WW577  (via drill 1.02 pad 1.78)
  other vias: 41.91,59.37
WW578  (via drill 1.02 pad 1.78)
  other vias: 41.91,61.91
WW579  (via drill 1.02 pad 1.78)
  other vias: 41.91,64.45
WW580  (via drill 1.02 pad 1.78)
  other vias: 41.91,66.99
WW581  (via drill 1.02 pad 1.78)
  other vias: 41.91,69.53
WW582  (via drill 1.02 pad 1.78)
  other vias: 41.91,72.07
WW583  (via drill 1.02 pad 1.78)
  other vias: 41.91,74.61
WW584  (via drill 1.02 pad 1.78)
  other vias: 41.91,77.15
WW585  (via drill 1.02 pad 1.78)
  other vias: 41.91,79.69
WW586  (via drill 1.02 pad 1.78)
  other vias: 41.91,82.23
WW587  (via drill 1.02 pad 1.78)
  other vias: 41.91,84.77
WW588  (via drill 1.02 pad 1.78)
  other vias: 41.91,87.31
WW589  (via drill 1.02 pad 1.78)
  other vias: 41.91,89.85
WW590  (via drill 1.02 pad 1.78)
  other vias: 41.91,92.39
WW592  (via drill 1.02 pad 1.78)
  other vias: 44.45,3.49
WW593  (via drill 1.02 pad 1.78)
  other vias: 44.45,6.03
WW594  (via drill 1.02 pad 1.78)
  other vias: 44.45,8.57
WW595  (via drill 1.02 pad 1.78)
  other vias: 44.45,11.11
WW596  (via drill 1.02 pad 1.78)
  other vias: 44.45,13.65
WW597  (via drill 1.02 pad 1.78)
  other vias: 44.45,16.19
WW598  (via drill 1.02 pad 1.78)
  other vias: 44.45,18.73
WW599  (via drill 1.02 pad 1.78)
  other vias: 44.45,21.27
WW600  (via drill 1.02 pad 1.78)
  other vias: 44.45,23.81
WW601  (via drill 1.02 pad 1.78)
  other vias: 44.45,26.35
WW602  (via drill 1.02 pad 1.78)
  other vias: 44.45,28.89
WW603  (via drill 1.02 pad 1.78)
  other vias: 44.45,31.43
WW604  (via drill 1.02 pad 1.78)
  other vias: 44.45,33.97
WW605  (via drill 1.02 pad 1.78)
  other vias: 44.45,36.51
WW606  (via drill 1.02 pad 1.78)
  other vias: 44.45,39.05
WW607  (via drill 1.02 pad 1.78)
  other vias: 44.45,41.59
WW608  (via drill 1.02 pad 1.78)
  other vias: 44.45,44.13
WW609  (via drill 1.02 pad 1.78)
  other vias: 44.45,46.67
WW610  (via drill 1.02 pad 1.78)
  other vias: 44.45,49.21
WW611  (via drill 1.02 pad 1.78)
  other vias: 44.45,51.75
WW612  (via drill 1.02 pad 1.78)
  other vias: 44.45,54.29
WW613  (via drill 1.02 pad 1.78)
  other vias: 44.45,56.83
WW614  (via drill 1.02 pad 1.78)
  other vias: 44.45,59.37
WW615  (via drill 1.02 pad 1.78)
  other vias: 44.45,61.91
WW616  (via drill 1.02 pad 1.78)
  other vias: 44.45,64.45
WW617  (via drill 1.02 pad 1.78)
  other vias: 44.45,66.99
WW618  (via drill 1.02 pad 1.78)
  other vias: 44.45,69.53
WW619  (via drill 1.02 pad 1.78)
  other vias: 44.45,72.07
WW620  (via drill 1.02 pad 1.78)
  other vias: 44.45,74.61
WW621  (via drill 1.02 pad 1.78)
  other vias: 44.45,77.15
WW622  (via drill 1.02 pad 1.78)
  other vias: 44.45,79.69
WW623  (via drill 1.02 pad 1.78)
  other vias: 44.45,82.23
WW624  (via drill 1.02 pad 1.78)
  other vias: 44.45,84.77
WW625  (via drill 1.02 pad 1.78)
  other vias: 44.45,87.31
WW626  (via drill 1.02 pad 1.78)
  other vias: 44.45,89.85
WW627  (via drill 1.02 pad 1.78)
  other vias: 44.45,92.39
WW629  (via drill 1.02 pad 1.78)
  other vias: 46.99,3.49
WW630  (via drill 1.02 pad 1.78)
  other vias: 46.99,6.03
WW631  (via drill 1.02 pad 1.78)
  other vias: 46.99,8.57
WW632  (via drill 1.02 pad 1.78)
  other vias: 46.99,11.11
WW633  (via drill 1.02 pad 1.78)
  other vias: 46.99,13.65
WW634  (via drill 1.02 pad 1.78)
  other vias: 46.99,16.19
WW635  (via drill 1.02 pad 1.78)
  other vias: 46.99,18.73
WW636  (via drill 1.02 pad 1.78)
  other vias: 46.99,21.27
WW637  (via drill 1.02 pad 1.78)
  other vias: 46.99,23.81
WW638  (via drill 1.02 pad 1.78)
  other vias: 46.99,26.35
WW639  (via drill 1.02 pad 1.78)
  other vias: 46.99,28.89
WW640  (via drill 1.02 pad 1.78)
  other vias: 46.99,31.43
WW641  (via drill 1.02 pad 1.78)
  other vias: 46.99,33.97
WW642  (via drill 1.02 pad 1.78)
  other vias: 46.99,36.51
WW643  (via drill 1.02 pad 1.78)
  other vias: 46.99,39.05
WW644  (via drill 1.02 pad 1.78)
  other vias: 46.99,41.59
WW645  (via drill 1.02 pad 1.78)
  other vias: 46.99,44.13
WW646  (via drill 1.02 pad 1.78)
  other vias: 46.99,46.67
WW647  (via drill 1.02 pad 1.78)
  other vias: 46.99,49.21
WW648  (via drill 1.02 pad 1.78)
  other vias: 46.99,51.75
WW649  (via drill 1.02 pad 1.78)
  other vias: 46.99,54.29
WW650  (via drill 1.02 pad 1.78)
  other vias: 46.99,56.83
WW651  (via drill 1.02 pad 1.78)
  other vias: 46.99,59.37
WW652  (via drill 1.02 pad 1.78)
  other vias: 46.99,61.91
WW653  (via drill 1.02 pad 1.78)
  other vias: 46.99,64.45
WW654  (via drill 1.02 pad 1.78)
  other vias: 46.99,66.99
WW655  (via drill 1.02 pad 1.78)
  other vias: 46.99,69.53
WW656  (via drill 1.02 pad 1.78)
  other vias: 46.99,72.07
WW657  (via drill 1.02 pad 1.78)
  other vias: 46.99,74.61
WW658  (via drill 1.02 pad 1.78)
  other vias: 46.99,77.15
WW659  (via drill 1.02 pad 1.78)
  other vias: 46.99,79.69
WW660  (via drill 1.02 pad 1.78)
  other vias: 46.99,82.23
WW661  (via drill 1.02 pad 1.78)
  other vias: 46.99,84.77
WW662  (via drill 1.02 pad 1.78)
  other vias: 46.99,87.31
WW663  (via drill 1.02 pad 1.78)
  other vias: 46.99,89.85
WW664  (via drill 1.02 pad 1.78)
  other vias: 46.99,92.39
WW666  (via drill 1.02 pad 1.78)
  other vias: 49.53,3.49
WW667  (via drill 1.02 pad 1.78)
  other vias: 49.53,6.03
WW668  (via drill 1.02 pad 1.78)
  other vias: 49.53,8.57
WW669  (via drill 1.02 pad 1.78)
  other vias: 49.53,11.11
WW670  (via drill 1.02 pad 1.78)
  other vias: 49.53,13.65
WW671  (via drill 1.02 pad 1.78)
  other vias: 49.53,16.19
WW672  (via drill 1.02 pad 1.78)
  other vias: 49.53,18.73
WW673  (via drill 1.02 pad 1.78)
  other vias: 49.53,21.27
WW674  (via drill 1.02 pad 1.78)
  other vias: 49.53,23.81
WW675  (via drill 1.02 pad 1.78)
  other vias: 49.53,26.35
WW676  (via drill 1.02 pad 1.78)
  other vias: 49.53,28.89
WW677  (via drill 1.02 pad 1.78)
  other vias: 49.53,31.43
WW678  (via drill 1.02 pad 1.78)
  other vias: 49.53,33.97
WW679  (via drill 1.02 pad 1.78)
  other vias: 49.53,36.51
WW680  (via drill 1.02 pad 1.78)
  other vias: 49.53,39.05
WW681  (via drill 1.02 pad 1.78)
  other vias: 49.53,41.59
WW682  (via drill 1.02 pad 1.78)
  other vias: 49.53,44.13
WW683  (via drill 1.02 pad 1.78)
  other vias: 49.53,46.67
WW684  (via drill 1.02 pad 1.78)
  other vias: 49.53,49.21
WW685  (via drill 1.02 pad 1.78)
  other vias: 49.53,51.75
WW686  (via drill 1.02 pad 1.78)
  other vias: 49.53,54.29
WW687  (via drill 1.02 pad 1.78)
  other vias: 49.53,56.83
WW688  (via drill 1.02 pad 1.78)
  other vias: 49.53,59.37
WW689  (via drill 1.02 pad 1.78)
  other vias: 49.53,61.91
WW690  (via drill 1.02 pad 1.78)
  other vias: 49.53,64.45
WW691  (via drill 1.02 pad 1.78)
  other vias: 49.53,66.99
WW692  (via drill 1.02 pad 1.78)
  other vias: 49.53,69.53
WW693  (via drill 1.02 pad 1.78)
  other vias: 49.53,72.07
WW694  (via drill 1.02 pad 1.78)
  other vias: 49.53,74.61
WW695  (via drill 1.02 pad 1.78)
  other vias: 49.53,77.15
WW696  (via drill 1.02 pad 1.78)
  other vias: 49.53,79.69
WW697  (via drill 1.02 pad 1.78)
  other vias: 49.53,82.23
WW698  (via drill 1.02 pad 1.78)
  other vias: 49.53,84.77
WW699  (via drill 1.02 pad 1.78)
  other vias: 49.53,87.31
WW700  (via drill 1.02 pad 1.78)
  other vias: 49.53,89.85
WW701  (via drill 1.02 pad 1.78)
  other vias: 49.53,92.39
WW703  (via drill 1.02 pad 1.78)
  other vias: 52.07,3.49
WW704  (via drill 1.02 pad 1.78)
  other vias: 52.07,6.03
WW705  (via drill 1.02 pad 1.78)
  other vias: 52.07,8.57
WW706  (via drill 1.02 pad 1.78)
  other vias: 52.07,11.11
WW707  (via drill 1.02 pad 1.78)
  other vias: 52.07,13.65
WW708  (via drill 1.02 pad 1.78)
  other vias: 52.07,16.19
WW709  (via drill 1.02 pad 1.78)
  other vias: 52.07,18.73
WW710  (via drill 1.02 pad 1.78)
  other vias: 52.07,21.27
WW711  (via drill 1.02 pad 1.78)
  other vias: 52.07,23.81
WW712  (via drill 1.02 pad 1.78)
  other vias: 52.07,26.35
WW713  (via drill 1.02 pad 1.78)
  other vias: 52.07,28.89
WW714  (via drill 1.02 pad 1.78)
  other vias: 52.07,31.43
WW715  (via drill 1.02 pad 1.78)
  other vias: 52.07,33.97
WW716  (via drill 1.02 pad 1.78)
  other vias: 52.07,36.51
WW717  (via drill 1.02 pad 1.78)
  other vias: 52.07,39.05
WW718  (via drill 1.02 pad 1.78)
  other vias: 52.07,41.59
WW719  (via drill 1.02 pad 1.78)
  other vias: 52.07,44.13
WW720  (via drill 1.02 pad 1.78)
  other vias: 52.07,46.67
WW721  (via drill 1.02 pad 1.78)
  other vias: 52.07,49.21
WW722  (via drill 1.02 pad 1.78)
  other vias: 52.07,51.75
WW723  (via drill 1.02 pad 1.78)
  other vias: 52.07,54.29
WW724  (via drill 1.02 pad 1.78)
  other vias: 52.07,56.83
WW725  (via drill 1.02 pad 1.78)
  other vias: 52.07,59.37
WW726  (via drill 1.02 pad 1.78)
  other vias: 52.07,61.91
WW727  (via drill 1.02 pad 1.78)
  other vias: 52.07,64.45
WW728  (via drill 1.02 pad 1.78)
  other vias: 52.07,66.99
WW729  (via drill 1.02 pad 1.78)
  other vias: 52.07,69.53
WW730  (via drill 1.02 pad 1.78)
  other vias: 52.07,72.07
WW731  (via drill 1.02 pad 1.78)
  other vias: 52.07,74.61
WW732  (via drill 1.02 pad 1.78)
  other vias: 52.07,77.15
WW733  (via drill 1.02 pad 1.78)
  other vias: 52.07,79.69
WW734  (via drill 1.02 pad 1.78)
  other vias: 52.07,82.23
WW735  (via drill 1.02 pad 1.78)
  other vias: 52.07,84.77
WW736  (via drill 1.02 pad 1.78)
  other vias: 52.07,87.31
WW737  (via drill 1.02 pad 1.78)
  other vias: 52.07,89.85
WW738  (via drill 1.02 pad 1.78)
  other vias: 52.07,92.39
WW740  (via drill 1.02 pad 1.78)
  other vias: 54.61,3.49
WW741  (via drill 1.02 pad 1.78)
  other vias: 54.61,6.03
WW742  (via drill 1.02 pad 1.78)
  other vias: 54.61,8.57
WW743  (via drill 1.02 pad 1.78)
  other vias: 54.61,11.11
WW744  (via drill 1.02 pad 1.78)
  other vias: 54.61,13.65
WW745  (via drill 1.02 pad 1.78)
  other vias: 54.61,16.19
WW746  (via drill 1.02 pad 1.78)
  other vias: 54.61,18.73
WW747  (via drill 1.02 pad 1.78)
  other vias: 54.61,21.27
WW748  (via drill 1.02 pad 1.78)
  other vias: 54.61,23.81
WW749  (via drill 1.02 pad 1.78)
  other vias: 54.61,26.35
WW750  (via drill 1.02 pad 1.78)
  other vias: 54.61,28.89
WW751  (via drill 1.02 pad 1.78)
  other vias: 54.61,31.43
WW752  (via drill 1.02 pad 1.78)
  other vias: 54.61,33.97
WW753  (via drill 1.02 pad 1.78)
  other vias: 54.61,36.51
WW754  (via drill 1.02 pad 1.78)
  other vias: 54.61,39.05
WW755  (via drill 1.02 pad 1.78)
  other vias: 54.61,41.59
WW756  (via drill 1.02 pad 1.78)
  other vias: 54.61,44.13
WW757  (via drill 1.02 pad 1.78)
  other vias: 54.61,46.67
WW758  (via drill 1.02 pad 1.78)
  other vias: 54.61,49.21
WW759  (via drill 1.02 pad 1.78)
  other vias: 54.61,51.75
WW760  (via drill 1.02 pad 1.78)
  other vias: 54.61,54.29
WW761  (via drill 1.02 pad 1.78)
  other vias: 54.61,56.83
WW762  (via drill 1.02 pad 1.78)
  other vias: 54.61,59.37
WW763  (via drill 1.02 pad 1.78)
  other vias: 54.61,61.91
WW764  (via drill 1.02 pad 1.78)
  other vias: 54.61,64.45
WW765  (via drill 1.02 pad 1.78)
  other vias: 54.61,66.99
WW766  (via drill 1.02 pad 1.78)
  other vias: 54.61,69.53
WW767  (via drill 1.02 pad 1.78)
  other vias: 54.61,72.07
WW768  (via drill 1.02 pad 1.78)
  other vias: 54.61,74.61
WW769  (via drill 1.02 pad 1.78)
  other vias: 54.61,77.15
WW770  (via drill 1.02 pad 1.78)
  other vias: 54.61,79.69
WW771  (via drill 1.02 pad 1.78)
  other vias: 54.61,82.23
WW772  (via drill 1.02 pad 1.78)
  other vias: 54.61,84.77
WW773  (via drill 1.02 pad 1.78)
  other vias: 54.61,87.31
WW774  (via drill 1.02 pad 1.78)
  other vias: 54.61,89.85
WW775  (via drill 1.02 pad 1.78)
  other vias: 54.61,92.39
WW777  (via drill 1.02 pad 1.78)
  other vias: 57.15,3.49
WW778  (via drill 1.02 pad 1.78)
  other vias: 57.15,6.03
WW779  (via drill 1.02 pad 1.78)
  other vias: 57.15,8.57
WW780  (via drill 1.02 pad 1.78)
  other vias: 57.15,11.11
WW781  (via drill 1.02 pad 1.78)
  other vias: 57.15,13.65
WW782  (via drill 1.02 pad 1.78)
  other vias: 57.15,16.19
WW783  (via drill 1.02 pad 1.78)
  other vias: 57.15,18.73
WW784  (via drill 1.02 pad 1.78)
  other vias: 57.15,21.27
WW785  (via drill 1.02 pad 1.78)
  other vias: 57.15,23.81
WW786  (via drill 1.02 pad 1.78)
  other vias: 57.15,26.35
WW787  (via drill 1.02 pad 1.78)
  other vias: 57.15,28.89
WW788  (via drill 1.02 pad 1.78)
  other vias: 57.15,31.43
WW789  (via drill 1.02 pad 1.78)
  other vias: 57.15,33.97
WW790  (via drill 1.02 pad 1.78)
  other vias: 57.15,36.51
WW791  (via drill 1.02 pad 1.78)
  other vias: 57.15,39.05
WW792  (via drill 1.02 pad 1.78)
  other vias: 57.15,41.59
WW793  (via drill 1.02 pad 1.78)
  other vias: 57.15,44.13
WW794  (via drill 1.02 pad 1.78)
  other vias: 57.15,46.67
WW795  (via drill 1.02 pad 1.78)
  other vias: 57.15,49.21
WW796  (via drill 1.02 pad 1.78)
  other vias: 57.15,51.75
WW797  (via drill 1.02 pad 1.78)
  other vias: 57.15,54.29
WW798  (via drill 1.02 pad 1.78)
  other vias: 57.15,56.83
WW799  (via drill 1.02 pad 1.78)
  other vias: 57.15,59.37
WW800  (via drill 1.02 pad 1.78)
  other vias: 57.15,61.91
WW801  (via drill 1.02 pad 1.78)
  other vias: 57.15,64.45
WW802  (via drill 1.02 pad 1.78)
  other vias: 57.15,66.99
WW803  (via drill 1.02 pad 1.78)
  other vias: 57.15,69.53
WW804  (via drill 1.02 pad 1.78)
  other vias: 57.15,72.07
WW805  (via drill 1.02 pad 1.78)
  other vias: 57.15,74.61
WW806  (via drill 1.02 pad 1.78)
  other vias: 57.15,77.15
WW807  (via drill 1.02 pad 1.78)
  other vias: 57.15,79.69
WW808  (via drill 1.02 pad 1.78)
  other vias: 57.15,82.23
WW809  (via drill 1.02 pad 1.78)
  other vias: 57.15,84.77
WW810  (via drill 1.02 pad 1.78)
  other vias: 57.15,87.31
WW811  (via drill 1.02 pad 1.78)
  other vias: 57.15,89.85
WW812  (via drill 1.02 pad 1.78)
  other vias: 57.15,92.39
WW814  (via drill 1.02 pad 1.78)
  other vias: 59.69,3.49
WW815  (via drill 1.02 pad 1.78)
  other vias: 59.69,6.03
WW816  (via drill 1.02 pad 1.78)
  other vias: 59.69,8.57
WW817  (via drill 1.02 pad 1.78)
  other vias: 59.69,11.11
WW818  (via drill 1.02 pad 1.78)
  other vias: 59.69,13.65
WW819  (via drill 1.02 pad 1.78)
  other vias: 59.69,16.19
WW820  (via drill 1.02 pad 1.78)
  other vias: 59.69,18.73
WW821  (via drill 1.02 pad 1.78)
  other vias: 59.69,21.27
WW822  (via drill 1.02 pad 1.78)
  other vias: 59.69,23.81
WW823  (via drill 1.02 pad 1.78)
  other vias: 59.69,26.35
WW824  (via drill 1.02 pad 1.78)
  other vias: 59.69,28.89
WW825  (via drill 1.02 pad 1.78)
  other vias: 59.69,31.43
WW826  (via drill 1.02 pad 1.78)
  other vias: 59.69,33.97
WW827  (via drill 1.02 pad 1.78)
  other vias: 59.69,36.51
WW828  (via drill 1.02 pad 1.78)
  other vias: 59.69,39.05
WW829  (via drill 1.02 pad 1.78)
  other vias: 59.69,41.59
WW830  (via drill 1.02 pad 1.78)
  other vias: 59.69,44.13
WW831  (via drill 1.02 pad 1.78)
  other vias: 59.69,46.67
WW832  (via drill 1.02 pad 1.78)
  other vias: 59.69,49.21
WW833  (via drill 1.02 pad 1.78)
  other vias: 59.69,51.75
WW834  (via drill 1.02 pad 1.78)
  other vias: 59.69,54.29
WW835  (via drill 1.02 pad 1.78)
  other vias: 59.69,56.83
WW836  (via drill 1.02 pad 1.78)
  other vias: 59.69,59.37
WW837  (via drill 1.02 pad 1.78)
  other vias: 59.69,61.91
WW838  (via drill 1.02 pad 1.78)
  other vias: 59.69,64.45
WW839  (via drill 1.02 pad 1.78)
  other vias: 59.69,66.99
WW840  (via drill 1.02 pad 1.78)
  other vias: 59.69,69.53
WW841  (via drill 1.02 pad 1.78)
  other vias: 59.69,72.07
WW842  (via drill 1.02 pad 1.78)
  other vias: 59.69,74.61
WW843  (via drill 1.02 pad 1.78)
  other vias: 59.69,77.15
WW844  (via drill 1.02 pad 1.78)
  other vias: 59.69,79.69
WW845  (via drill 1.02 pad 1.78)
  other vias: 59.69,82.23
WW846  (via drill 1.02 pad 1.78)
  other vias: 59.69,84.77
WW847  (via drill 1.02 pad 1.78)
  other vias: 59.69,87.31
WW848  (via drill 1.02 pad 1.78)
  other vias: 59.69,89.85
WW849  (via drill 1.02 pad 1.78)
  other vias: 59.69,92.39
WW851  (via drill 1.02 pad 1.78)
  other vias: 62.23,3.49
WW852  (via drill 1.02 pad 1.78)
  other vias: 62.23,6.03
WW853  (via drill 1.02 pad 1.78)
  other vias: 62.23,8.57
WW854  (via drill 1.02 pad 1.78)
  other vias: 62.23,11.11
WW855  (via drill 1.02 pad 1.78)
  other vias: 62.23,13.65
WW856  (via drill 1.02 pad 1.78)
  other vias: 62.23,16.19
WW857  (via drill 1.02 pad 1.78)
  other vias: 62.23,18.73
WW858  (via drill 1.02 pad 1.78)
  other vias: 62.23,21.27